# Altium PCB PCB.PcbDoc
Units mm, origin at the board's own origin, x right, y up, seen from the top; angles counter-clockwise.
Board outline 108.58 x 122.68 mm, 2 copper layers (Top Layer, Bottom Layer); 8 components, 20 nets, 83 pads, 0 vias.
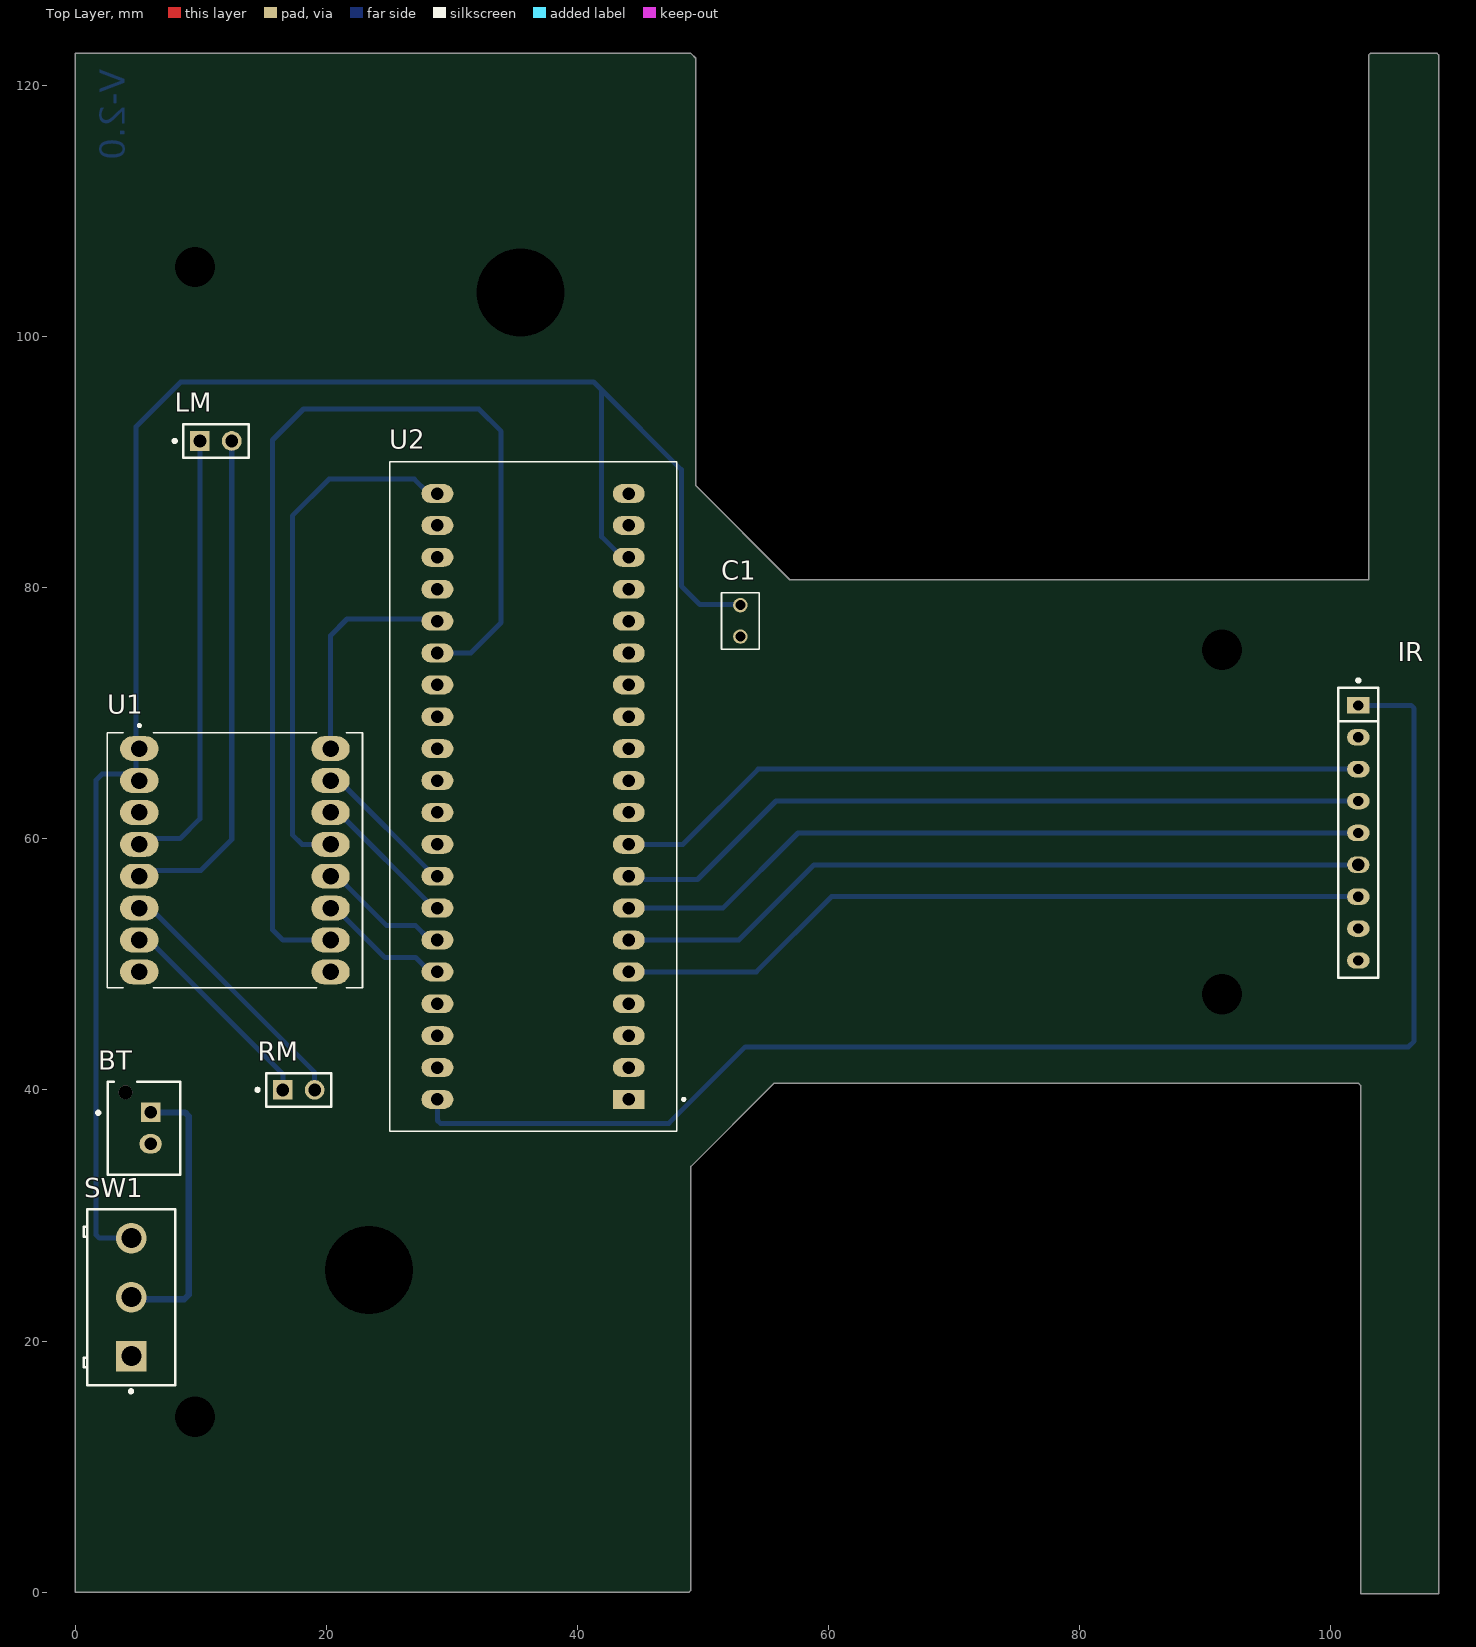
[diagram p0: Top Layer view]
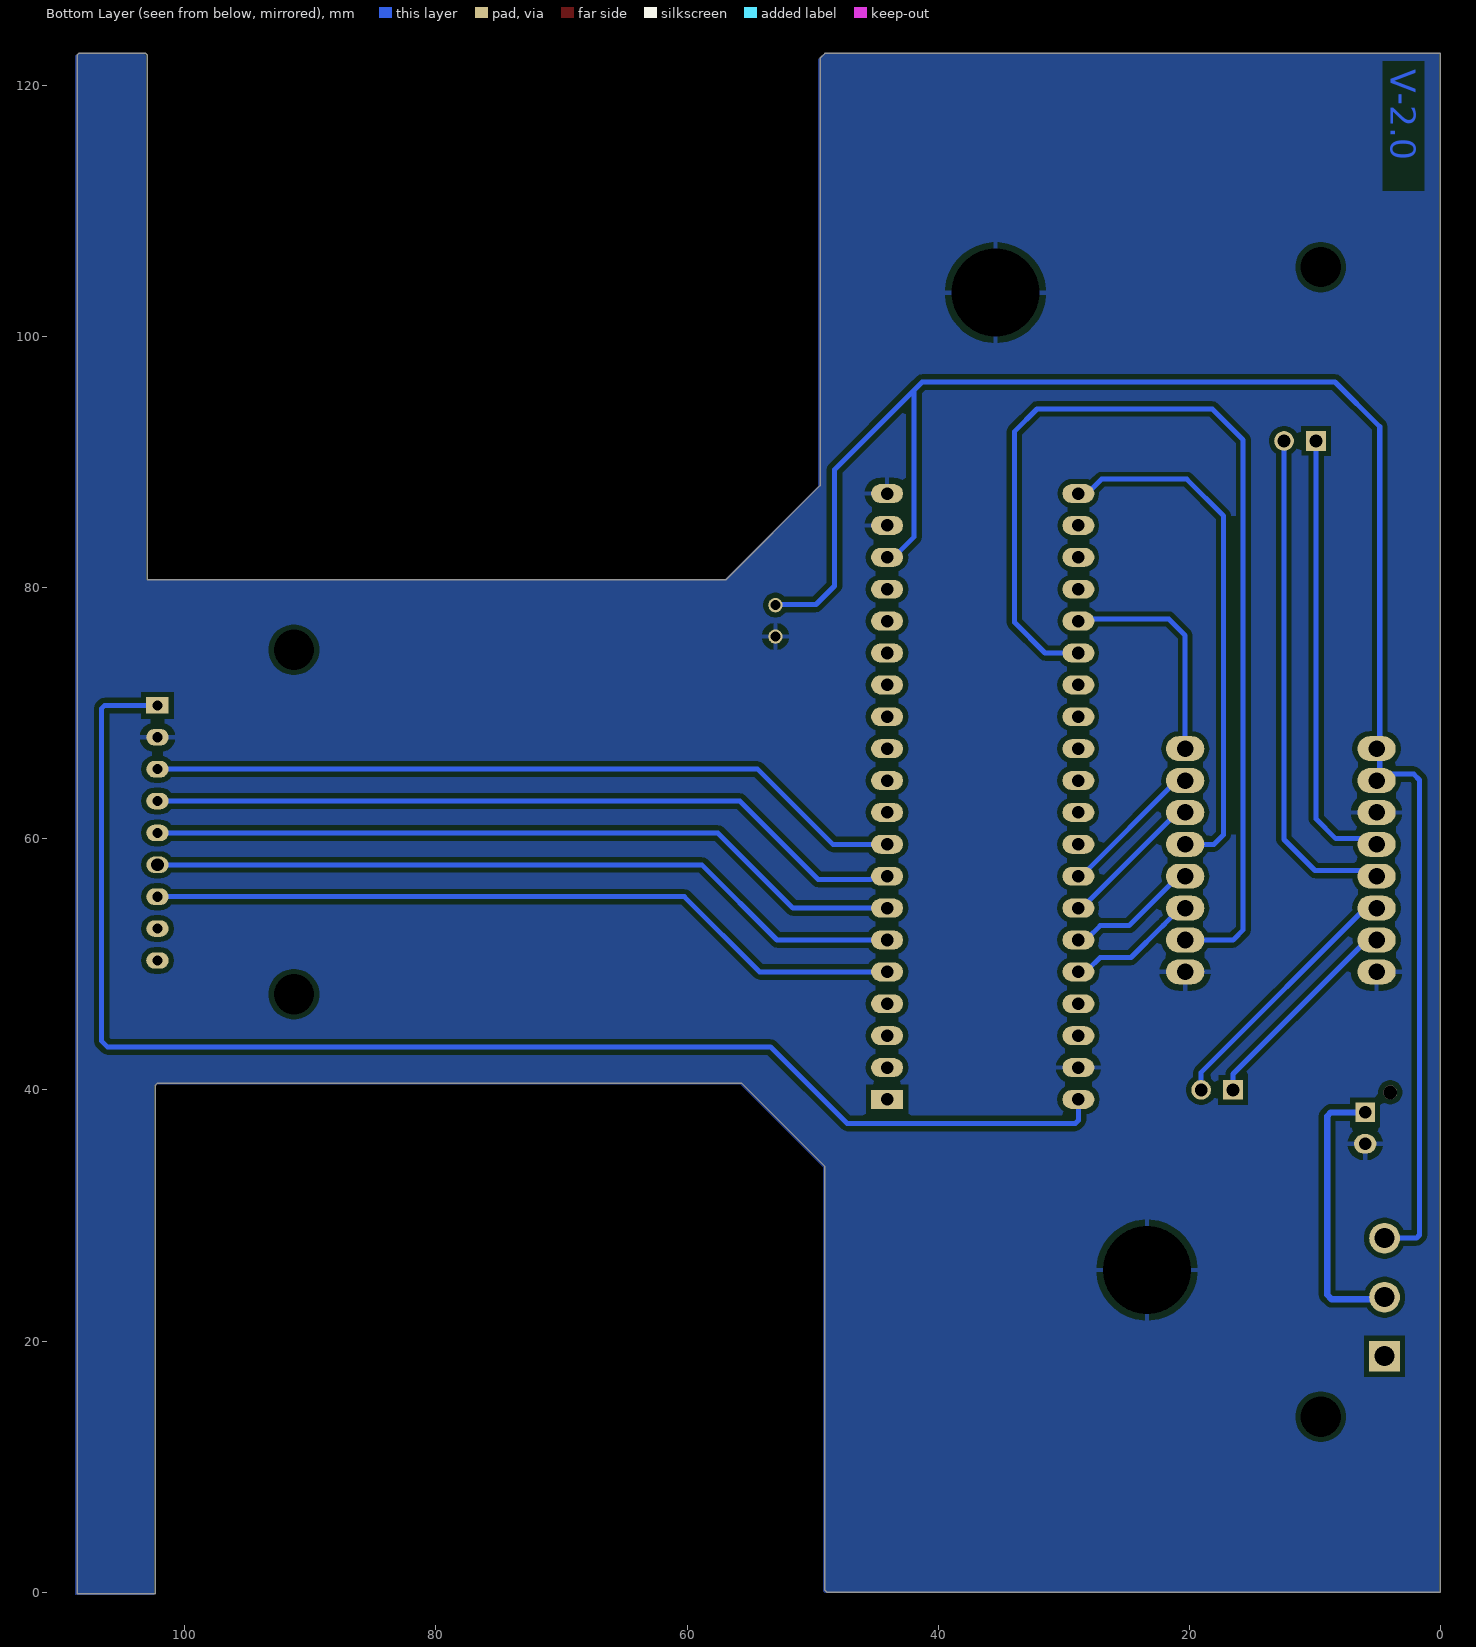
[diagram p1: Bottom Layer view, seen from below]
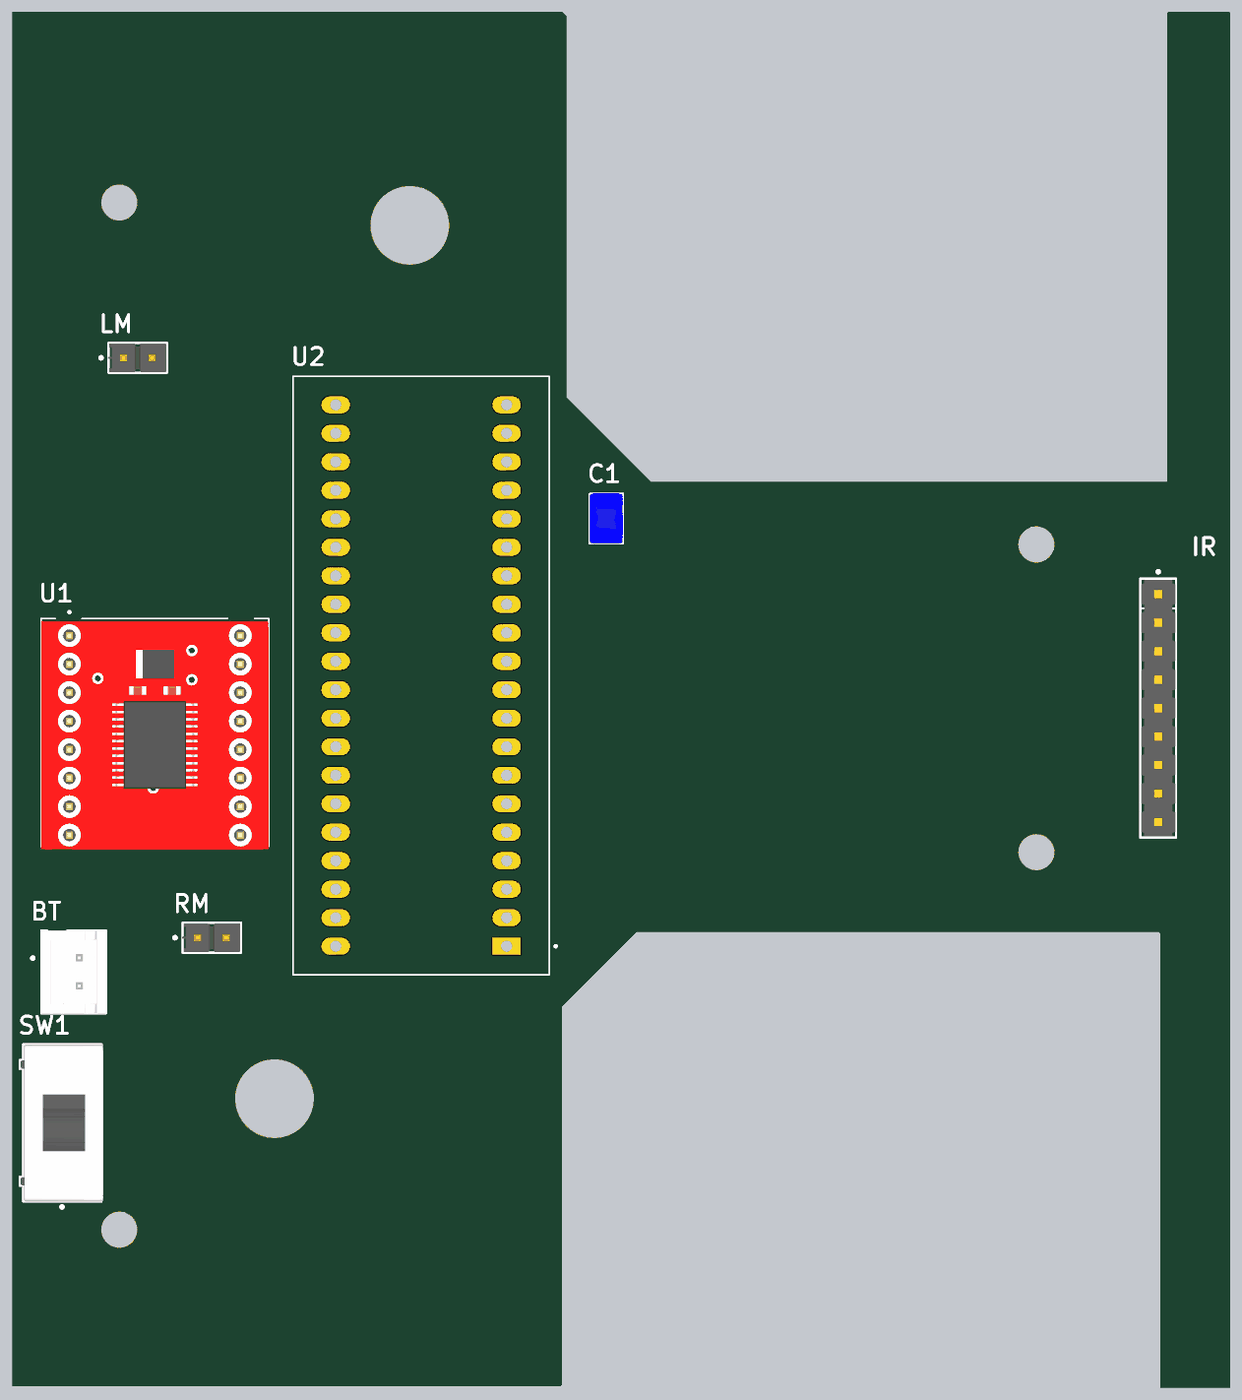
[diagram p2: 3D render of the assembled board from above, using the file's embedded part models]

## Layer stack, top to bottom
Top Solder: solder mask 0.0102, Solder Resist, Dk 3.5
Top Layer: signal copper 0.0356
Dielectric 1: dielectric 0.32, FR-4, Dk 4.8
Bottom Layer: signal copper 0.0356
Bottom Solder: solder mask 0.0102, Solder Resist, Dk 3.5

## Board outline
0,0 48.873,0 49.022,0.149 49.022,33.909 55.626,40.513 102.213,40.513 102.362,40.364 102.362,-0.127 108.585,-0.127 108.585,122.428 108.458,122.555 103.124,122.555 102.997,122.428 102.997,80.645 56.896,80.645 49.403,88.138 49.403,122.174 49.022,122.555 0,122.555

## Design rules (kind name [scope] priority, off if disabled: settings)
Clearance [All] p1: gap=0.4 ignorepadtopadclearanceinfootprint=FALSE
HoleSize [All] p1: absolutevalues=TRUE maxlimit=3.2 minlimit=0.025 maxpercent=80.000 minpercent=20.000
PlaneConnect [All] p1: planeconnectstyle=Relief reliefexpansion=0.4 reliefentries=4 reliefconductorwidth=0.5 reliefairgap=0.525
PolygonConnect [All] p1: connectstyle=Relief reliefconductorwidth=0.381 reliefentries=4 polygonreliefangle="90 Angle" airgapwidth=0.508
RoutingVias [All] p1: holewidth=0.711 width=1.27 viastyle="Through Hole" minholewidth=0.711 minwidth=1.27 maxholewidth=0.711 maxwidth=1.27
SolderMaskExpansion [All] p1: expansion=0.102 istentingtop=FALSE
SupplyNets "Schematic Supply Nets_1" [InNet('GND')] p1: voltage=0.000
Width Width_1 [InNet('NetBT_1')] p1: maxlimit=0.5 minlimit=0.45 preferedwidth=0.5
Width [All] p2: maxlimit=0.8 minlimit=0.35 preferedwidth=0.4
28 further rules are at their usual default settings.

## Components (designator, comment, footprint, x,y, rotation, side; value= is the part's Value field where it differs from the comment)
BT "B2B-XH-AM(LF)(SN)" FP-B2B-XH-AM_LF_SN-MFG 5.461,36.957 r90 top
C1 "FA14X8R1H104KNU06" CAPRB250W50L450T300H550 52.959,77.363 r90 top
IR "CES-109-01-G-S" FP-CES-109-01-G-S-MFG 102.181,60.472 r270 top
LM "TSW-102-12-T-S" FP-TSW-102-12-T-S-MFG 11.176,91.694 r0 top
RM "TSW-102-12-T-S" FP-TSW-102-12-T-S-MFG 17.78,40.005 r0 top
SW1 "CS12ANW03" FP-CS12ANW03-MFG 4.445,23.495 r90 top
U1 "ROB-14450" MODULE_ROB-14450 12.7,58.293 r0 top
U2 "ZC323000" MODULE_ZC323000 36.449,63.373 r180 top

## Footprints (in the part's own frame and the unit in brackets; to place one, negate y for a bottom-side part, rotate by r counter-clockwise, add the part's x,y. Pads: shape width x height; smd on the part's side, far side on the other; paste and mask are expansions set on the pad)
CAPRB250W50L450T300H550 [mm]
  round 1.15 hole 0.8: 1(-1.25,0) 2(1.25,0)
  silkscreen extent -2.25,-1.5 2.25,1.5, body extent -2.25,-1.5 2.25,1.5, height 5.5
FP-B2B-XH-AM_LF_SN-MFG [mm]
  rect 1.55x1.55 hole 1 paste-2539.97 mask+0: 1(1.25,-0.525)
  oval 1.55x1.779 hole 1 paste-2539.97 mask+0: 2(-1.25,-0.525)
  round 1.1 hole 1.1 unplated paste-2539.97 mask+0: ""(2.85,1.475)
  silkscreen extent -3.7,-2.88 3.7,3.77, body extent -3.8,-2.98 3.8,2.98, height 0.25
FP-CES-109-01-G-S-MFG [mm]
  rect 1.31x1.793 hole 0.81 paste-2539.97 mask+0: 1(-10.16,0)
  oval 1.31x1.793 hole 0.81 paste-2539.97 mask+0: 2(-7.62,0) 3(-5.08,0) 4(-2.54,0) 5(0,0) 7(5.08,0) 8(7.62,0) 9(10.16,0)
  oval 1.296x1.779 hole 1 paste-2539.97 mask+0: 6(2.54,0)
  silkscreen extent -12.27,-1.59 11.54,1.59, body extent -11.65,-1.69 11.65,1.69, height 0.25
FP-CS12ANW03-MFG [mm]
  rect 2.45x2.45 hole 1.6 paste-2539.97 mask+0: 1(-4.7,0)
  round 2.45 hole 1.6 paste-2539.97 mask+0: 2(0,0) 3(4.7,0)
  silkscreen extent -7.62,-3.5 7,3.8, body extent -7.1,-3.6 7.1,3.91, height 0.25
FP-TSW-102-12-T-S-MFG [mm]
  rect 1.57x1.57 hole 1.02 paste-2539.97 mask+0: 1(-1.27,0)
  round 1.57 hole 1.02 paste-2539.97 mask+0: 2(1.27,0)
  silkscreen extent -3.4,-1.34 2.6,1.33, body extent -2.71,-1.44 2.71,1.44, height 0.25
MODULE_ROB-14450 [mm]
  oval 3.048x1.98 hole 1.32: 1(-7.62,8.89) 2(-7.62,6.35) 3(-7.62,3.81) 4(-7.62,1.27) 5(-7.62,-1.27) 6(-7.62,-3.81) 7(-7.62,-6.35) 8(-7.62,-8.89) 9(7.62,-8.89) 10(7.62,-6.35) 11(7.62,-3.81) 12(7.62,-1.27) 13(7.62,1.27) 14(7.62,3.81) 15(7.62,6.35) 16(7.62,8.89)
  silkscreen extent -10.16,-10.16 10.16,10.83, body extent -10.16,-10.41 10.16,9.91, height 5.5
MODULE_ZC323000 [mm]
  rect 2.54x1.508 hole 1: 1(-7.62,24.13)
  oval 2.54x1.508 hole 1: 2(-7.62,21.59) 3(-7.62,19.05) 4(-7.62,16.51) 5(-7.62,13.97) 6(-7.62,11.43) 7(-7.62,8.89) 8(-7.62,6.35) 9(-7.62,3.81) 10(-7.62,1.27) 11(-7.62,-1.27) 12(-7.62,-3.81) 13(-7.62,-6.35) 14(-7.62,-8.89) 15(-7.62,-11.43) 16(-7.62,-13.97) 17(-7.62,-16.51) 18(-7.62,-19.05) 19(-7.62,-21.59) 20(-7.62,-24.13) 21(7.62,-24.13) 22(7.62,-21.59) 23(7.62,-19.05) 24(7.62,-16.51) 25(7.62,-13.97) 26(7.62,-11.43) 27(7.62,-8.89) 28(7.62,-6.35) 29(7.62,-3.81) 30(7.62,-1.27) 31(7.62,1.27) 32(7.62,3.81) 33(7.62,6.35) 34(7.62,8.89) 35(7.62,11.43) 36(7.62,13.97) 37(7.62,16.51) 38(7.62,19.05) 39(7.62,21.59) 40(7.62,24.13)
  silkscreen extent -12.1,-26.67 11.43,26.67, body extent -11.61,-26.81 11.39,30.99, height 9.1

## Part data
BT: library part CMP-17439-000037-1, "CONN HEADER VERT 2POS 2.5MM", Color=Green, Contact Resistance=20mR, Housing Color=White, Max Current Rating=3A, Max Operating Temperature=85°C, Max Voltage Rating (AC)=250V, Min Operating Temperature=-25°C, Connector Type="Male Pin", Contact Material=Brass, Contact Plating=Tin, Contact Type="Male Pin", Depth=5.75mm, Fastening Type=Detent, Housing Material=Polyamide, Lead Free="Lead Free", Length=7.4mm, Mount="Through Hole", Number of Positions=2, Number of Rows=1, Orientation=Straight, Packaging=Bulk, Pitch=2.5mm, Series=XH, Termination=Solder
C1: "0.1 ÂµF Â±10% 50V Ceramic Capacitor X8R Radial", Package="NON STANDARD-2 TDK", Check_prices=https://www.snapeda.com/parts/FA14X8R1H104KNU06/TDK/view-part/?ref=eda, MF=TDK, MP=FA14X8R1H104KNU06, SnapEDA_Link=https://www.snapeda.com/parts/FA14X8R1H104KNU06/TDK/view-part/?ref=snap
IR: library part CMP-00575-09340057-1, "CES-109-01-G-S Conn Socket Strip SKT 9 POS 2.54mm Solder ST Top Entry Thru-Hole Tube", Contact Resistance=10mΩ, Current Rating=5.5A, Housing Color=Black, Manufacturer Lifecycle Status=PRODUCTION, Max Current Rating=1A, Max Operating Temperature=125°C, Max Voltage Rating (AC)=333V, Min Operating Temperature=-55°C, Voltage Rating=400V, Contact Material="Bronze, Gold, Nickel", Contact Plating=Gold, Depth=3.05mm, Gender=Receptacle, Height=5.21mm, Housing Material=Polyester, Length=22.86mm, Lifecycle Status=Production, NexarPartId=9340057, Number of Contacts=9, Number of Rows=1, Orientation=Straight, Pitch=2.54mm, Radiation Hardening=No, REACH SVHC="No SVHC", RoHS=Compliant, Termination=Solder
LM RM: library part CMP-02766-001444-1, "CONN HEADER VERT 2POS 2.54MM", Contact Material=Bronze, Contact Plating=Tin, Gender=Male, Mount="Through Hole", Number of Contacts=2, Number of Rows=1, Packaging=Bulk, Pitch=2.54mm, Radiation Hardening=No, REACH SVHC="No SVHC", RoHS Compliant=Yes, Termination=Solder
SW1: library part CMP-31746-000002-1, "SWITCH SLIDE SPDT 3A 125V", Contact Current Rating=3A, Flammability Rating="UL94 V-0", Max Operating Temperature=85°C, Max Voltage Rating (AC)=250V, Min Operating Temperature=-30°C, Package Quantity=1, Voltage Rating (AC)=125V, Actuator Length=5.1mm, Actuator Material=Nylon, Actuator Type=Standard, Contact Material=Copper, Contact Plating=Silver, Contact Style=Non-Shorting, Current Rating=3A, Depth=7.5mm, Electrical Life=20000Cycles, Illumination Type=Non-Illuminated, Lead Free="Lead Free", Length=14mm, Max Current Rating=3A, Mechanical Life=50000Cycles, Mount="Through Hole", Orientation=Vertical, Packaging=Tray, Primary Type=SWITCH, Reach SVHC Compliant=Yes, RoHS Compliant=Yes, Series=CS, Switch Function=On-On, Switch Travel=2.2mm, Termination="PC Pin", Throw Configuration=SPDT
U1: "TB6612FNG Motor Controller/Driver Power Management Evaluation Board", Package=None, Availability="In Stock", Check_prices=https://www.snapeda.com/parts/ROB-14450/SparkFun%20Electronics/view-part/2656367/?ref=eda, MF="SparkFun Electronics", MP=ROB-14450, Price=None, SnapEDA_Link=https://www.snapeda.com/parts/ROB-14450/SparkFun%20Electronics/view-part/2656367/?ref=snap
U2: "STM32F103C8T6 ARM STM32 Minimum System Development Board Module For Arduino", Package=None, Availability=Unavailable, MP=ZC323000, Price=None

## Free pads (board coordinates)
  round 1.524 hole 7: 2(23.368,25.654)
  rect 1.524x1.524 hole 7: 2(35.433,103.505)
  round 1.524 hole 3.2: 3(9.525,13.97) 3(9.525,105.537) 3(91.313,47.625) 3(91.313,75.057)

## Nets (pads, with @x,y where several pads share a name; then routed paths per layer and width w, separated by ;. In a path a pad name is that pad's centre, name@x,y a point inside that pad or via, vN(x,y) a via of type N, cw(c..) or ccw(c..) an arc to the next point about the centre after c; other vN are vias at no path point)
GND: BT.2 C1.1 IR.2 pad.2 U1.3 U1.8 U1.9 U2.19 U2.20 U2.39
NetBT_1: BT.1 SW1.2 | length 22.1
  Bottom Layer w0.5: SW1.2@4.409,23.335 8.669,23.335 9.017,23.683 9.017,37.914 8.724,38.207 BT.1
NetC1_2: C1.2 SW1.3 U1.1 U1.2 U2.18 | length 148
  Bottom Layer w0.4: SW1.3 1.904,28.195 1.651,28.448 1.651,64.689 2.113,65.151 4.77,65.151 U1.2@4.825,65.096 ; U1.2 5.08,64.841 U1.2@4.825,65.096 ; U1.1 U1.1@4.825,67.183 ; U2.18 43.541,82.423 41.91,84.054 41.91,95.758 ; C1.2 52.909,78.663 49.734,78.663 48.26,80.137 48.26,89.408 41.91,95.758 ; U1.2@4.825,65.096 U1.1@4.825,67.183 ; U1.1@4.825,67.183 4.825,92.836 8.382,96.393 41.275,96.393 41.91,95.758
NetIR_1: IR.1 U2.40 | length 113.3
  Bottom Layer w0.4: U2.40 28.829,37.572 29.063,37.338 47.264,37.338 53.36,43.434 106.172,43.434 106.626,43.888 106.626,70.397 106.392,70.632 IR.1
NetIR_3: IR.3 U2.9 | length 60.6
  Bottom Layer w0.4: U2.9 48.387,59.563 54.376,65.552 IR.3
NetIR_4: IR.4 U2.8 | length 60.8
  Bottom Layer w0.4: U2.8 44.281,56.811 45.331,56.811 45.373,56.769 49.55,56.769 55.792,63.012 IR.4
NetIR_5: IR.5 U2.7 | length 60.6
  Bottom Layer w0.4: U2.7 51.562,54.483 57.551,60.472 IR.5
NetIR_6: IR.6 U2.6 | length 60.6
  Bottom Layer w0.4: U2.6 52.832,51.943 58.821,57.932 IR.6
NetIR_7: IR.7 U2.5 | length 60.6
  Bottom Layer w0.4: U2.5 54.229,49.403 60.218,55.392 IR.7
NetLM_1: LM.1 U1.4 | length 35.8
  Bottom Layer w0.4: U1.4@4.825,60.016 8.327,60.016 9.906,61.595 LM.1
NetLM_2: LM.2 U1.5 | length 40.4
  Bottom Layer w0.4: U1.5@4.825,57.476 9.978,57.476 12.446,59.944 LM.2
NetRM_1: RM.1 U1.7 | length 17.1
  Bottom Layer w0.4: U1.7 5.842,51.943 16.51,41.275 RM.1
NetRM_2: RM.2 U1.6 | length 20.5
  Bottom Layer w0.4: U1.6@5.516,54.936 19.05,41.402 RM.2
NetU1_10: U1.10 U2.26 | length 85.3
  Bottom Layer w0.4: U1.10 16.51,51.943 16.384,52.069 15.699,52.754 15.699,91.772 18.161,94.234 32.131,94.234 33.909,92.456 33.909,77.226 31.486,74.803 U2.26
NetU1_11: U1.11 U2.36 | length 10.6
  Bottom Layer w0.4: U1.11 20.701,54.483 21.987,53.197 cw(c20.854,51.943) 22.108,53.076 24.638,50.546 27.091,50.546 28.074,49.564 28.537,49.564 28.668,49.564 U2.36
NetU1_12: U1.12 U2.35 | length 10.6
  Bottom Layer w0.4: U1.12 20.854,57.023 24.791,53.086 27.091,53.086 28.074,52.104 28.537,52.104 28.668,52.104 U2.35
NetU1_13: U1.13 U2.21 | length 42
  Bottom Layer w0.4: U1.13 18.034,59.563 17.272,60.325 17.272,85.725 20.193,88.646 26.986,88.646 27.968,87.664 28.537,87.664 28.668,87.664 U2.21
NetU1_14: U1.14 U2.34 | length 11.7
  Bottom Layer w0.4: U1.14 20.955,62.103 28.575,54.483 U2.34
NetU1_15: U1.15 U2.33 | length 11.7
  Bottom Layer w0.4: U1.15 20.993,64.643 28.613,57.023 U2.33
NetU1_16: U1.16 U2.25 | length 18.1
  Bottom Layer w0.4: U1.16 20.32,76.2 21.624,77.504 28.537,77.504 28.668,77.504 U2.25
pads on no net: BT. IR.8 IR.9 SW1.1 U2.1 U2.2 U2.3 U2.4 U2.10 U2.11 U2.12 U2.13 U2.14 U2.15 U2.16 U2.17 U2.22 U2.23 U2.24 U2.27 U2.28 U2.29 U2.30 U2.31 U2.32 U2.37 U2.38

## Polygon pours and split planes (outlines as drawn)
GND on Bottom Layer "GND_L02_P000" (solid, pour order 0): 0.127,122.492 49.149,122.492 49.53,122.111 49.53,88.075 57.023,80.581 103.124,80.581 103.124,122.364 103.251,122.492 108.585,122.492 108.712,122.364 108.712,-0.191 102.489,-0.191 102.489,40.302 102.344,40.447 55.755,40.447 55.753,40.449 49.149,33.846 49.149,0.064 49.022,-0.064 0.127,-0.064

## Other copper
Bottom Layer:
  text "V-2.0" at 3.937,121.285 h2 r90